# Altium PCB FMC-320U-B1.PcbDoc (part 1 of 2)
Units mil, origin at the board's own origin, x right, y up, seen from the top; angles counter-clockwise.
Board outline 3385.83 x 3385.83 mil, 2 copper layers (Top Layer, Bottom Layer), stack 65.8 mil thick; 83 components, 122 nets, 425 pads, 151 vias.
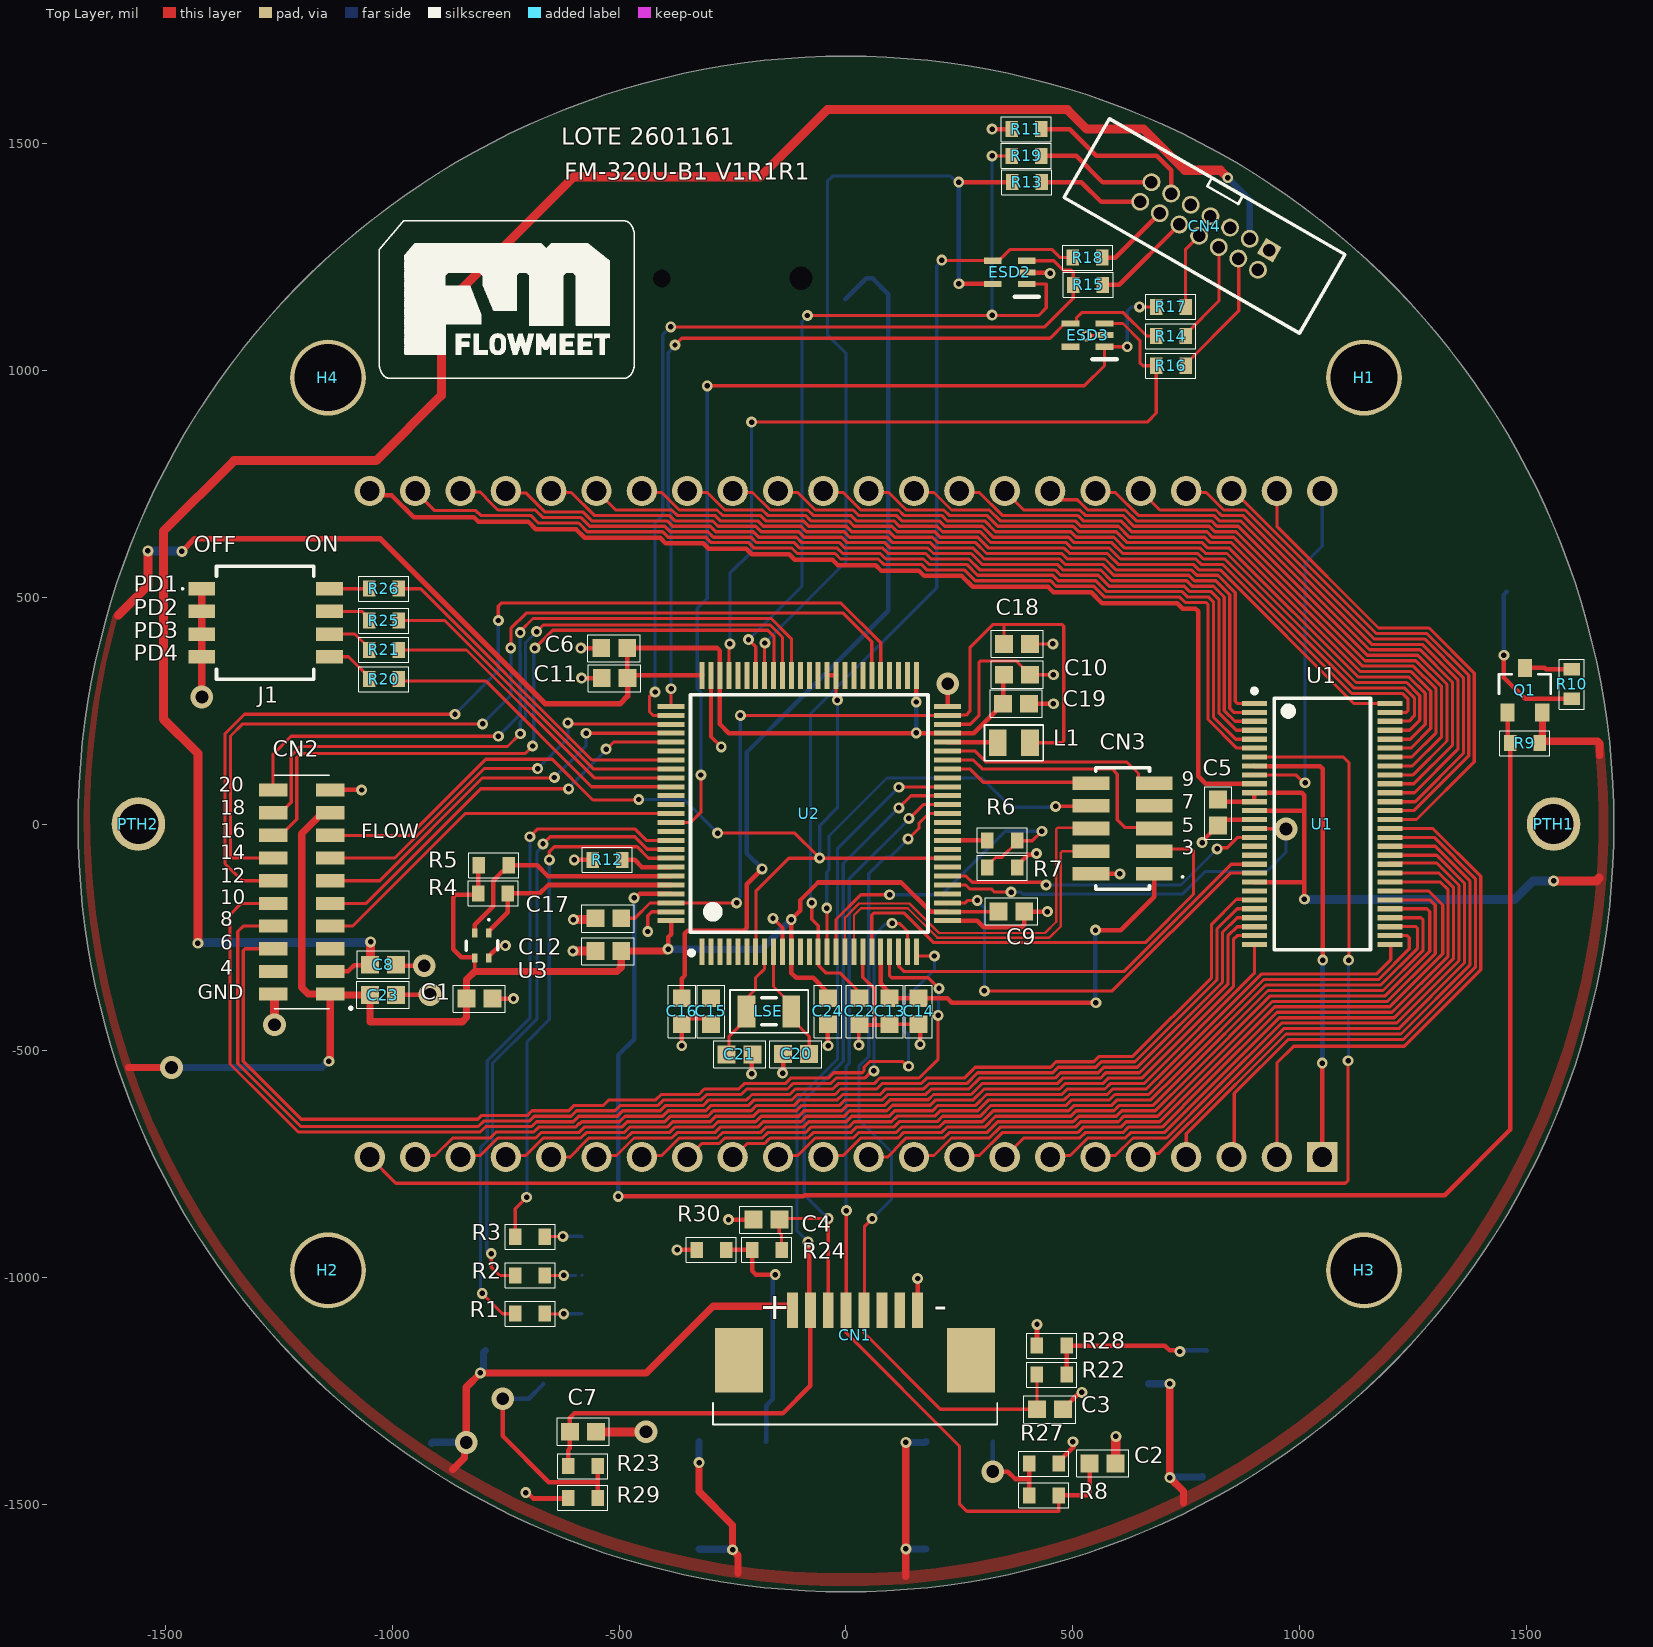
[diagram p0: Top Layer view]
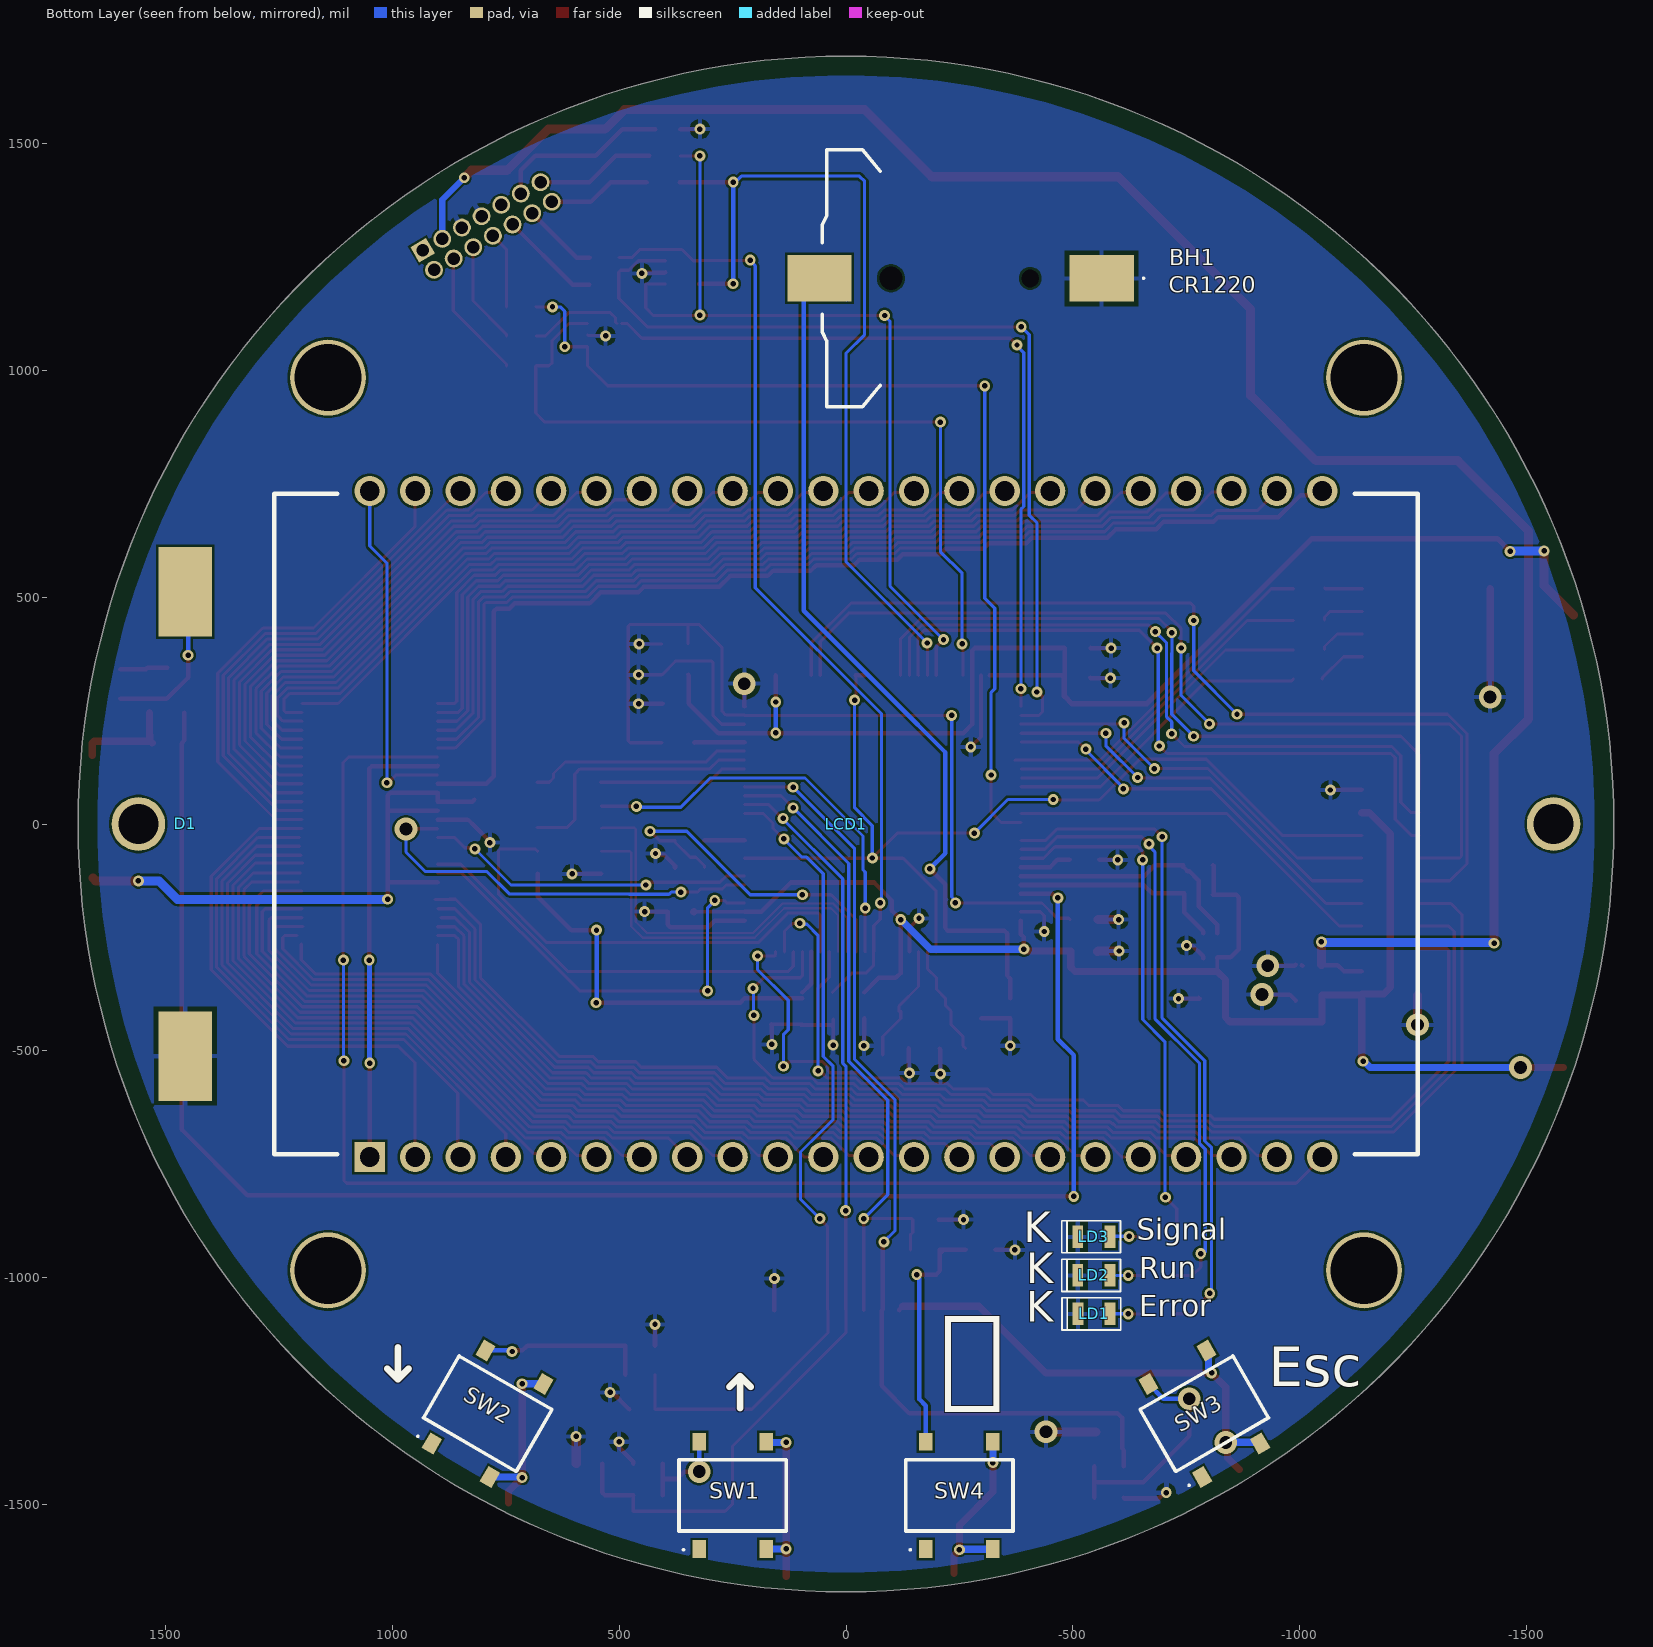
[diagram p1: Bottom Layer view, seen from below]
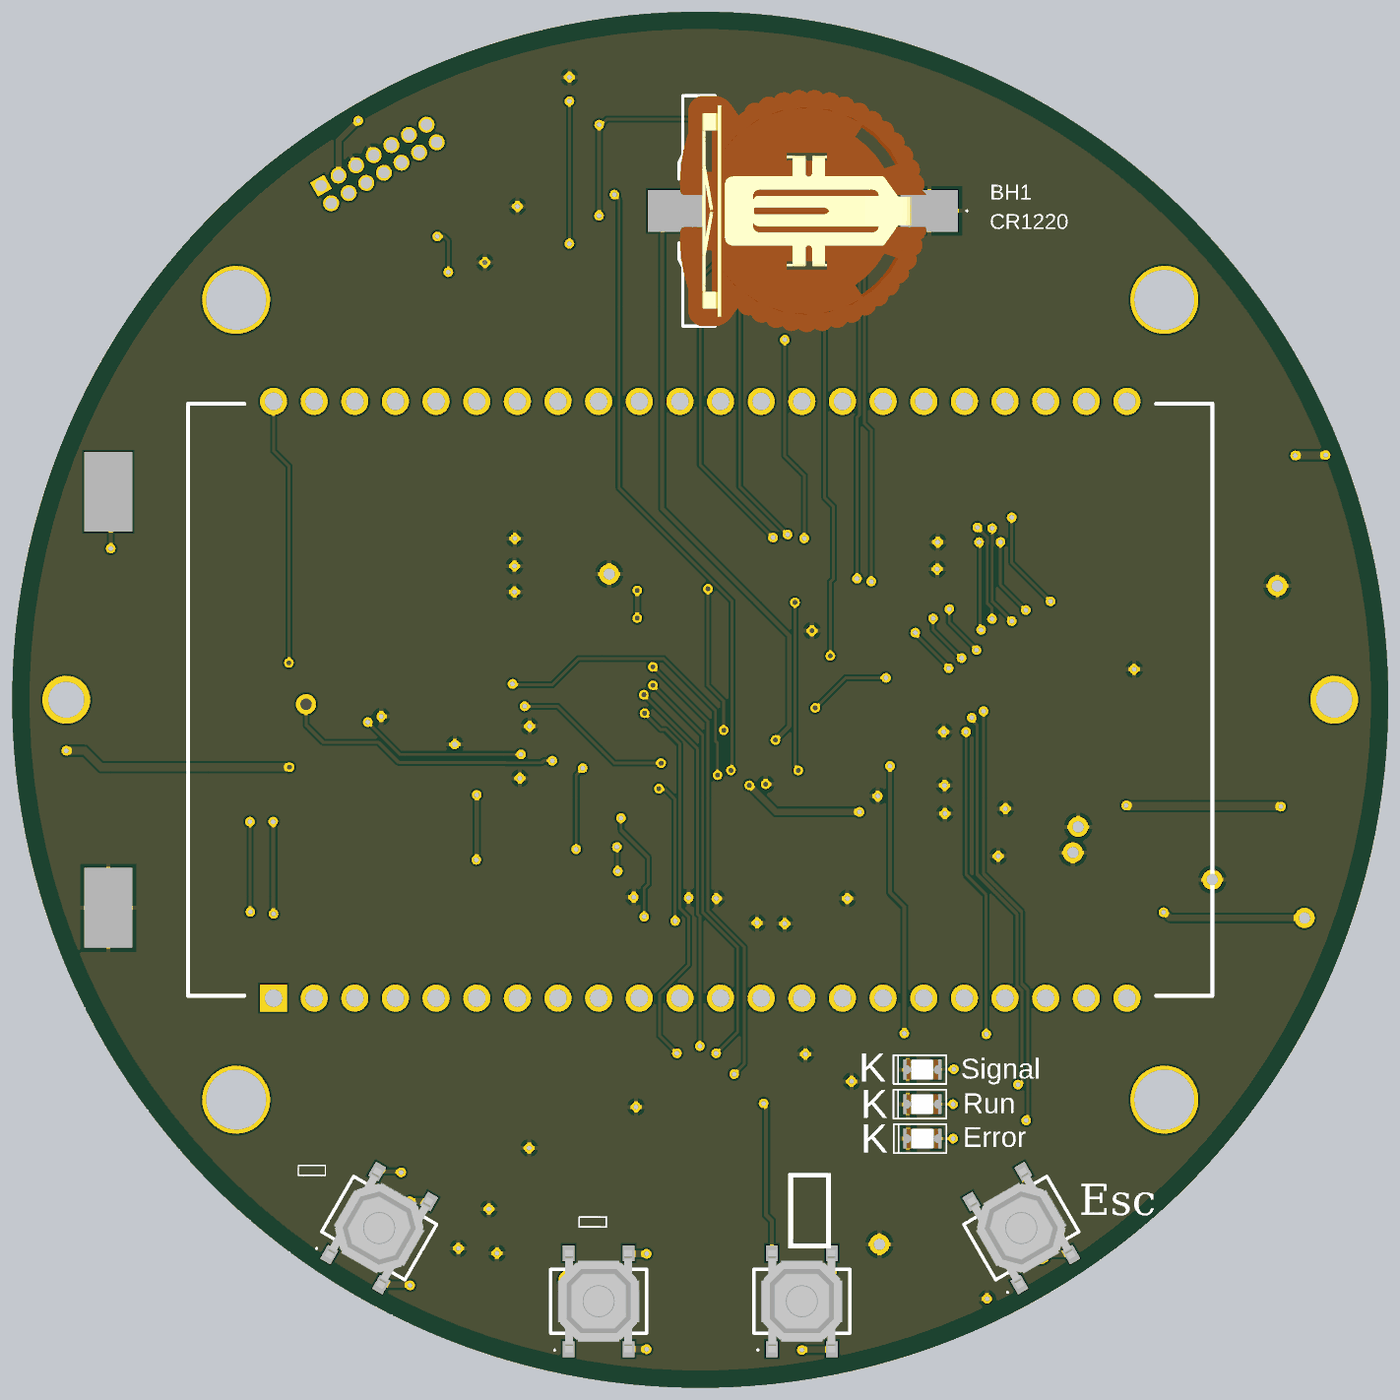
[diagram p3: 3D render of the assembled board from below, using the file's embedded part models]

## Layer stack, top to bottom
Top Solder: solder mask 0.4, Solder Resist, Dk 3.5
Top Layer: signal copper 1.4
Dielectric 1: dielectric 63, FR-4, Dk 4.8
Bottom Layer: signal copper 1.4
Bottom Solder: solder mask 0.4, Solder Resist, Dk 3.5

## Board outline
0,-1692.91 cw(c0,0) -1692.91,0 cw(c0,0) 0,1692.91 cw(c0,0) 1692.91,0 cw(c0,0)

## Design rules (kind name [scope] priority, off if disabled: settings)
BoardOutlineClearance [All] p1: gap=10 ignorepadtopadclearanceinfootprint=FALSE except(0: Arc-SplitContinuation Track-SplitContinuation SMDPad-SplitContinuation THPad-SplitContinuation Via-SplitContinuation Fill-SplitContinuation Poly-SplitContinuation Region-SplitContinuation Text-SplitContinuation)
Clearance [All] p1: gap=5 ignorepadtopadclearanceinfootprint=FALSE
HoleSize [All] p1: absolutevalues=TRUE maxlimit=235 minlimit=6 maxpercent=80.000 minpercent=20.000
MinimumSolderMaskSliver [All] p1: minsoldermaskwidth=4
NetAntennae [All] p1: netantennaetolerance=1
PolygonConnect [All] p1: connectstyle=Relief reliefconductorwidth=10 reliefentries=4 polygonreliefangle="90 Angle" airgapwidth=10
RoutingVias [All] p1: holewidth=12 width=16 viastyle="Through Hole" minholewidth=28 minwidth=50 maxholewidth=12 maxwidth=24 useviatemplates=TRUE viatemplateguid#1={D86EAC3F-4B13-4CEF-9B37-389D9234238A} viatemplatename#1=v61h30
SilkToSolderMaskClearance [IsPad] p1: minsilkscreentomaskgap=5 clearancetoexposedcopper=TRUE
SolderMaskExpansion [All] p1: expansion=2 istentingtop=FALSE
Width [All] p1: maxlimit=100 minlimit=5 preferedwidth=7
26 further rules are at their usual default settings.

## Components (designator, comment, footprint, x,y, rotation, side; value= is the part's Value field where it differs from the comment)
BH1 "BS-12-B3AA011" BS-12-B3AA011 -252.54,1203 r0 bottom locked
C1 "100nF" CAP_SM0603_YAGEOCC2_N#1 -808,-385 r180 top
C2 "100nF" CAP_SM0603_YAGEOCC2_N#1 565.83,-1410 r0 top
C3 "100nF" CAP_SM0603_YAGEOCC2_N#1 449.69,-1290.19 r180 top
C4 "100nF" CAP_SM0603_YAGEOCC2_N#1 -175.62,-872 r180 top
C5 "100nF" CAP_SM0603_YAGEOCC2_N#1 820,25 r270 top
C6 "100nF" CAP_SM0603_YAGEOCC2_N#1 -511,388 r180 top
C7 "100nF" CAP_SM0603_YAGEOCC2_N#1 -580,-1340 r0 top
C8 "100nF" CAP_SM0603_YAGEOCC2_N#1 -1020.64,-310.43 r0 top
C9 "100nF" CAP_SM0603_YAGEOCC2_N#1 364.44,-193 r0 top
C10 "100nF" CAP_SM0603_YAGEOCC2_N#1 376.81,329 r0 top
C11 "100nF" CAP_SM0603_YAGEOCC2_N#1 -510,322 r180 top
C12 "100nF" CAP_SM0603_YAGEOCC2_N#1 -524,-280 r180 top
C13 "100nF" CAP_SM0603_YAGEOCC2_N#1 96,-412.87 r270 top
C14 "2.2uF" CAP_SM0603_YAGEOCC2_N#1 160,-412.87 r270 top
C15 "100nF" CAP_SM0603_YAGEOCC2_N#1 -298,-412.87 r270 top
C16 "1uF" CAP_SM0603_YAGEOCC2_N#2 -362,-412.87 r270 top
C17 "2.2uF" CAP_SM0603_YAGEOCC2_N#1 -524,-207.71 r180 top
C18 "2.2uF" CAP_SM0603_YAGEOCC2_N#1 376.81,397 r0 top
C19 "10uF" CAP_SM0603_YAGEOCC2_N#1 374.93,265.14 r0 top
C20 "12pF" CAP_SM0603_YAGEOCC2_N#1 -110,-506.87 r180 top
C21 "12pF" CAP_SM0603_YAGEOCC2_N#1 -235,-507.87 r0 top
C22 "100nF" CAP_SM0603_YAGEOCC2_N#1 30,-412.87 r270 top
C23 "10uF" CAP_SM0603_YAGEOCC2_N#1 -1021,-377 r0 top
C24 "100nF" CAP_SM0603_YAGEOCC2_N#1 -40,-412.87 r270 top
CN1 "A10FC-S08FCA-H25" 849528 20,-1198 r0 top locked
CN2 "DW127S-22-20-43" DW127S-22-20-43 -1200,-150 r90 top
CN3 "DW127S-22-10-43" DW127S-22-10-43 610,-10 r90 top
CN4 "20021511-00014T4LF" 2002151100014T4LF 790.9,1318.35 r150 top
D1 "BACKLIGHT" BACKLIGHT_2 0,0 r180 bottom locked
ESD2 "ESDALC6V1W5" ESDALC6V1W5 361,1216 r180 top
ESD3 "ESDALC6V1W5" ESDALC6V1W5 532.6,1077.79 r180 top
H1 "C193465-HOLE" C193465-HOLE 1142,984 r0 top
H2 "C193465-HOLE" C193465-HOLE -1142,-984 r0 top
H3 "C193465-HOLE" C193465-HOLE 1142,-984 r0 top
H4 "C193465-HOLE" C193465-HOLE -1142,984 r0 top
J1 "DSHP04TSGER" DSHP04TSGER -1299.21,443.74 r270 top
L1 "2.2uH" LQM21PN2R2MGHL 370,179 r180 top
LCD1 "FM-160LCD-V2R2R1" "FMC-160LCD V2" 0,0 r180 bottom locked
LD1 "RED" "LED 0805" -546.81,-1080 r0 bottom
LD2 "RED" "LED 0805" -546.38,-995 r0 bottom
LD3 "GREEN" "LED 0805" -546.38,-910 r0 bottom
LSE "32,768 kHz" SC-32S32.768kHz20PPM12.5pF -170,-413 r180 top
PTH1 "PTH-2MM-M" PTH_M2_M 1560,0 r0 top
PTH2 "PTH-2MM-M" PTH_M2_M -1560,0 r0 top
Q1 "DMG3401LSN-7" DMG3401LSN-7 1496.89,300.85 r90 top
R1 "2K2" RES_SM0603_YAGEORC_N -696.63,-1079.61 r0 top
R2 "2K2" RES_SM0603_YAGEORC_N -696.56,-995.28 r0 top
R3 "2K2" RES_SM0603_YAGEORC_N -696.56,-910 r0 top
R4 "10K" RES_SM0603_YAGEORC_N -778,-153 r180 top
R5 "10K" RES_SM0603_YAGEORC_N -776.56,-91 r180 top
R6 "100K" RES_SM0603_YAGEORC_N 344.44,-36 r180 top
R7 "100K" RES_SM0603_YAGEORC_N 344.44,-96 r180 top
R8 "100K" RES_SM0603_YAGEORC_N 436.39,-1480 r0 top
R9 "1M" RES_SM0603_YAGEORC_N 1496.89,178.41 r0 top
R10 "47R" RES_SM0603_YAGEORC_N 1600,308.41 r90 top
R11 "100R" RES_SM0603_YAGEORC_N 397.87,1532 r0 top
R12 "10K" RES_SM0603_YAGEORC_N -526,-79 r0 top
R13 "47R" RES_SM0603_YAGEORC_N 398.78,1415 r180 top
R14 "47R" RES_SM0603_YAGEORC_N 716.08,1075.82 r180 top
R15 "47R" RES_SM0603_YAGEORC_N 533.6,1188.7 r180 top
R16 "47R" RES_SM0603_YAGEORC_N 716.08,1010.2 r180 top
R17 "47R" RES_SM0603_YAGEORC_N 716.08,1140.2 r180 top
R18 "47R" RES_SM0603_YAGEORC_N 532.6,1248.7 r180 top
R19 "47R" RES_SM0603_YAGEORC_N 397.87,1473 r180 top
R20 "1K" RES_SM0603_YAGEORC_N -1018.85,319.52 r0 top
R21 "1K" RES_SM0603_YAGEORC_N -1018.85,383.7 r0 top
R22 "100K" RES_SM0603_YAGEORC_N 453.62,-1214.06 r180 top
R23 "100K" RES_SM0603_YAGEORC_N -580,-1415.71 r180 top
R24 "100K" RES_SM0603_YAGEORC_N -174.56,-939 r0 top
R25 "1K" RES_SM0603_YAGEORC_N -1018.85,448.64 r0 top
R26 "1K" RES_SM0603_YAGEORC_N -1018.85,518.74 r0 top
R27 "100K" RES_SM0603_YAGEORC_N 436.39,-1410 r180 top
R28 "100K" RES_SM0603_YAGEORC_N 453.62,-1150 r0 top
R29 "100K" RES_SM0603_YAGEORC_N -580,-1485.71 r0 top
R30 "100K" RES_SM0603_YAGEORC_N -297,-939 r0 top
SW1 "TS-1187A-B-A-B" TS-1187A-B-A-B 250,-1480 r90 bottom locked
SW2 "TS-1187A-B-A-B" TS-1187A-B-A-B 790,-1300 r120 bottom
SW3 "TS-1187A-B-A-B" TS-1187A-B-A-B -790,-1300 r60 bottom
SW4 "TS-1187A-B-A-B" TS-1187A-B-A-B -250,-1480 r90 bottom
U1 "" "LCD DRIVER - TSSOP56" 1050,0 r0 top locked
U2 "STM32U575VIT6Q" STM32U575VI -81,23 r90 top locked
U3 "STS40-BD1B-R3" STS40BD1BR3 -803,-268 r270 top

## Footprints (in the part's own frame and the unit in brackets; to place one, negate y for a bottom-side part, rotate by r counter-clockwise, add the part's x,y. Pads: shape width x height; smd on the part's side, far side on the other; paste and mask are expansions set on the pad)
849528 [mm]
  rect 0.61x2 smd: 1(-3.5,3.2) 2(-2.5,3.2) 3(-1.5,3.2) 4(-0.5,3.2) 5(0.5,3.2) 6(1.5,3.2) 7(2.5,3.2) 8(3.5,3.2)
  rect 2.68x3.6 smd: MP1(-6.49,0.4) MP2(6.49,0.4)
  silkscreen extent -7.96,-3.2 7.96,-2, body extent -8.06,-3.11 7.87,3.43, height 2.64
2002151100014T4LF [mm]
  rect 1x1 hole 0.7: 1(-3.81,-0.635)
  round 1 hole 0.7: 2(-3.81,0.635) 3(-2.54,-0.635) 4(-2.54,0.635) 5(-1.27,-0.635) 6(-1.27,0.635) 7(0,-0.635) 8(0,0.635) 9(1.27,-0.635) 10(1.27,0.635) 11(2.54,-0.635) 12(2.54,0.635) 13(3.81,-0.635) 14(3.81,0.635)
  silkscreen extent -7.6,-2.54 7.62,2.55, body extent -7.57,-2.55 7.62,2.55, height 5.4
BACKLIGHT_2 [mm]
  rect 3x5 smd: 1(-37,13) 2(-37,-13)
  body extent -34.5,-16.5 34.5,16.5, height 2.8
BS-12-B3AA011 [mm]
  round 0.8 hole 1 unplated: 1(-3.9,0)
  round 1 hole 1.3 unplated: 2(3.9,0)
  rect 3.6x2.6 smd: NEG(-7.9,0) POS(7.9,0)
  silkscreen extent -10.3,-7.2 7.74,7.2, body extent -9.54,-7.55 9.26,7.59, height 3.83
C193465-HOLE [mm]
  round 4.25 hole 3.75: 1(0,0)
CAP_SM0603_YAGEOCC2_N#1 [mm] "Capacitor, Yageo CC Class2, SM0603, IPC Medium Density"
  rect 1x1 smd: 1(-0.727,0) 2(0.727,0)
  silkscreen extent -1.45,-0.75 1.47,0.78, body extent -0.9,-0.5 0.9,0.5, height 0.9
CAP_SM0603_YAGEOCC2_N#2 [mm] "Capacitor, Yageo CC Class2, SM0603, IPC Medium Density"
  rect 1x1 smd mask+0.051: 1(-0.727,0)
  rect 1x1 smd: 2(0.727,0)
  silkscreen extent -1.45,-0.75 1.47,0.78, body extent -0.9,-0.5 0.9,0.5, height 0.9
DMG3401LSN-7 [mm]
  rect 1x0.8 smd: D(1.1,0) G(-1.4,0.975) S(-1.4,-0.975)
  silkscreen extent -0.35,-1.45 0.75,1.45, body extent -1.68,-1.55 1.32,1.55, height 1.45
DSHP04TSGER [mm]
  rect 0.76x1.5 smd: A1(-1.905,-3.075) A2(-0.635,-3.075) A3(0.635,-3.075) A4(1.905,-3.075) B1(-1.905,4.075) B2(-0.635,4.075) B3(0.635,4.075) B4(1.905,4.075)
  silkscreen extent -3.16,-4.2 3.16,3.2, body extent -3.15,-2.85 3.15,3.85, height 1.65
DW127S-22-10-43 [mm]
  rect 0.76x2.05 smd: 1(-2.54,-1.775) 2(-2.54,1.775) 3(-1.27,-1.775) 4(-1.27,1.775) 5(0,-1.775) 6(0,1.775) 7(1.27,-1.775) 8(1.27,1.775) 9(2.54,-1.775) 10(2.54,1.775)
  silkscreen extent -3.4,-3.4 3.4,1.5, body extent -3.38,-2.29 3.43,2.21, height 4.5
DW127S-22-20-43 [mm]
  rect 0.74x1.6 smd: 1(-5.715,-1.6) 2(-5.715,1.6) 3(-4.445,-1.6) 4(-4.445,1.6) 5(-3.175,-1.6) 6(-3.175,1.6) 7(-1.905,-1.6) 8(-1.905,1.6) 9(-0.635,-1.6) 10(-0.635,1.6) 11(0.635,-1.6) 12(0.635,1.6) 13(1.905,-1.6) 14(1.905,1.6) 15(3.175,-1.6) 16(3.175,1.6) 17(4.445,-1.6) 18(4.445,1.6) 19(5.715,-1.6) 20(5.715,1.6)
  silkscreen extent -6.55,-2.8 6.54,1.53, body extent -6.58,-2.2 6.58,2.25, height 2.1
ESDALC6V1W5 [mm]
  rect 1x0.35 smd: 1(-0.95,0.65) 2(-0.95,0) 3(-0.95,-0.65) 4(0.95,-0.65) 5(0.95,0.65)
  silkscreen extent -1.62,1.35 -0.28,1.35, body extent -1.07,-1 1.03,1, height 1.1
"FMC-160LCD V2" [mm]
  rect 1.7x1.7 hole 1.1: 1(-26.67,-18.65)
  round 1.7 hole 1.1: 2(-24.13,-18.65) 3(-21.59,-18.65) 4(-19.05,-18.65) 5(-16.51,-18.65) 6(-13.97,-18.65) 7(-11.43,-18.65) 8(-8.89,-18.65) 9(-6.35,-18.65) 10(-3.81,-18.65) 11(-1.27,-18.65) 12(1.27,-18.65) 13(3.81,-18.65) 14(6.35,-18.65) 15(8.89,-18.65) 16(11.43,-18.65) 17(13.97,-18.65) 18(16.51,-18.65) 19(19.05,-18.65) 20(21.59,-18.65) 21(24.13,-18.65) 22(26.67,-18.65) 23(26.67,18.65) 24(24.13,18.65) 25(21.59,18.65) 26(19.05,18.65) 27(16.51,18.65) 28(13.97,18.65) 29(11.43,18.65) 30(8.89,18.65) 31(6.35,18.65) 32(3.81,18.65) 33(1.27,18.65) 34(-1.27,18.65) 35(-3.81,18.65) 36(-6.35,18.65) 37(-8.89,18.65) 38(-11.43,18.65) 39(-13.97,18.65) 40(-16.51,18.65) 41(-19.05,18.65) 42(-21.59,18.65) 43(-24.13,18.65) 44(-26.67,18.65)
  silkscreen extent -32,-18.5 32,18.5, body extent -32,-19.56 32,19.54, height 5.6
"LCD DRIVER - TSSOP56" [mm] "TSSOP, 56-Leads, Body 14,00x6,10mm, Pitch 0,50mm, IPC Medium Density"
  rect 1.4x0.295 smd: 1(-3.8,6.75) 2(-3.8,6.25) 3(-3.8,5.75) 4(-3.8,5.25) 5(-3.8,4.75) 6(-3.8,4.25) 7(-3.8,3.75) 8(-3.8,3.25) 9(-3.8,2.75) 10(-3.8,2.25) 11(-3.8,1.75) 12(-3.8,1.25) 13(-3.8,0.75) 14(-3.8,0.25) 15(-3.8,-0.25) 16(-3.8,-0.75) 17(-3.8,-1.25) 18(-3.8,-1.75) 19(-3.8,-2.25) 20(-3.8,-2.75) 21(-3.8,-3.25) 22(-3.8,-3.75) 23(-3.8,-4.25) 24(-3.8,-4.75) 25(-3.8,-5.25) 26(-3.8,-5.75) 27(-3.8,-6.25) 28(-3.8,-6.75) 29(3.8,-6.75) 30(3.8,-6.25) 31(3.8,-5.75) 32(3.8,-5.25) 33(3.8,-4.75) 34(3.8,-4.25) 35(3.8,-3.75) 36(3.8,-3.25) 37(3.8,-2.75) 38(3.8,-2.25) 39(3.8,-1.75) 40(3.8,-1.25) 41(3.8,-0.75) 42(3.8,-0.25) 43(3.8,0.25) 44(3.8,0.75) 45(3.8,1.25) 46(3.8,1.75) 47(3.8,2.25) 48(3.8,2.75) 49(3.8,3.25) 50(3.8,3.75) 51(3.8,4.25) 52(3.8,4.75) 53(3.8,5.25) 54(3.8,5.75) 55(3.8,6.25) 56(3.8,6.75)
  silkscreen extent -3.92,-7.05 2.7,7.57, body extent -4.05,-7.05 4.05,7.05, height 1.2
"LED 0805" [mm]
  rect 0.6x1.25 smd: A(-0.9,0) K(0.9,0)
  silkscreen extent -1.5,-0.9 1.8,0.9, body extent -1,-0.63 1,0.63, height 1
LQM21PN2R2MGHL [mm]
  rect 1x1.5 smd: 1(-0.9,0) 2(0.9,0)
  silkscreen extent -1.65,-1 1.65,1, body extent -1,-0.63 1,0.63, height 1.02
PTH_M2_M [mm]
  round 3 hole 2.25: 1(0,0)
RES_SM0603_YAGEORC_N [mm] "Resistor, Yageo RC_L, SM0603, IPC Medium Density"
  rect 0.7x0.9 smd: 1(-0.827,0) 2(0.827,0)
  silkscreen extent -1.4,-0.7 1.4,0.7, body extent -0.85,-0.45 0.85,0.45, height 0.55
SC-32S32.768kHz20PPM12.5pF [mm]
  rect 1x1.8 smd: 1(-1.25,0) 2(1.25,0)
  silkscreen extent -2.21,-1.19 2.18,1.19, body extent -1.65,-0.84 1.65,0.76, height 0.84
STM32U575VI [mm] "Ultra-low-power with FPU Arm Cortex-M33 MCU with TrustZone, 160 MHz with 2 Mbytes of Flash memory"
  rect 1.5x0.28 smd mask+0.051: 1(-7.738,6) 2(-7.738,5.5) 3(-7.738,5) 4(-7.738,4.5) 5(-7.738,4) 6(-7.738,3.5) 7(-7.738,3) 8(-7.738,2.5) 9(-7.738,2) 10(-7.738,1.5) 11(-7.738,1) 12(-7.738,0.5) 13(-7.738,0) 14(-7.738,-0.5) 15(-7.738,-1) 16(-7.738,-1.5) 17(-7.738,-2) 18(-7.738,-2.5) 19(-7.738,-3) 20(-7.738,-3.5) 21(-7.738,-4) 22(-7.738,-4.5) 23(-7.738,-5) 24(-7.738,-5.5) 25(-7.738,-6) 51(7.738,-6) 52(7.738,-5.5) 53(7.738,-5) 54(7.738,-4.5) 55(7.738,-4) 56(7.738,-3.5) 57(7.738,-3) 58(7.738,-2.5) 59(7.738,-2) 60(7.738,-1.5) 61(7.738,-1) 62(7.738,-0.5) 63(7.738,0) 64(7.738,0.5) 65(7.738,1) 66(7.738,1.5) 67(7.738,2) 68(7.738,2.5) 69(7.738,3) 70(7.738,3.5) 71(7.738,4) 72(7.738,4.5) 73(7.738,5) 74(7.738,5.5) 75(7.738,6)
  rect 0.28x1.5 smd mask+0.051: 26(-6,-7.738) 27(-5.5,-7.738) 28(-5,-7.738) 29(-4.5,-7.738) 30(-4,-7.738) 31(-3.5,-7.738) 32(-3,-7.738) 33(-2.5,-7.738) 34(-2,-7.738) 35(-1.5,-7.738) 36(-1,-7.738) 37(-0.5,-7.738) 38(0,-7.738) 39(0.5,-7.738) 40(1,-7.738) 41(1.5,-7.738) 42(2,-7.738) 43(2.5,-7.738) 44(3,-7.738) 45(3.5,-7.738) 46(4,-7.738) 47(4.5,-7.738) 48(5,-7.738) 49(5.5,-7.738) 50(6,-7.738) 76(6,7.738) 77(5.5,7.738) 78(5,7.738) 79(4.5,7.738) 80(4,7.738) 81(3.5,7.738) 82(3,7.738) 83(2.5,7.738) 84(2,7.738) 85(1.5,7.738) 86(1,7.738) 87(0.5,7.738) 88(0,7.738) 89(-0.5,7.738) 90(-1,7.738) 91(-1.5,7.738) 92(-2,7.738) 93(-2.5,7.738) 94(-3,7.738) 95(-3.5,7.738) 96(-4,7.738) 97(-4.5,7.738) 98(-5,7.738) 99(-5.5,7.738) 100(-6,7.738)
  silkscreen extent -7.9,-6.65 6.65,6.7, body extent -8.1,-8.1 8.1,8.1, height 1.6
STS40BD1BR3 [mm]
  rect 0.5x0.3 smd: 1(-0.7,0.4) 2(-0.7,-0.4) 3(0.7,-0.4) 4(0.7,0.4)
  silkscreen extent -1.5,-0.88 0.25,0.89, body extent -0.75,-0.75 0.75,0.75, height 0.75
TS-1187A-B-A-B [mm]
  rect 1x0.75 smd: 1(-3,1.875) 2(3,1.875) 3(-3,-1.875) 4(3,-1.875)
  silkscreen extent -3.1,-3 2,3, body extent -3.2,-2.55 3.2,2.55, height 2

## Part data
BH1: "Battery holder CR1020 SMD", Manufacturer=Myoung, Temperature Max=85, Temperature Min=-25, Category="Battery holder", Datasheet=https://datasheet.lcsc.com/lcsc/2012181809_MYOUNG-BS-08-B2AA016_C964792.pdf, Manufacturer part number=BS-12-B3AA011
C1 C2 C3 C4 C5 C6 C7 C8 C9 C10 C11 C12 C13 C15 C22 C24: library part CC0603KRX7R9BB104, "CAP 100nF SM0603 X7R 50V YAGEO CC2", Manufacturer=Yageo, Package=0603, Supplier Part Number 1=1362556, Tolerance (%)=10, Voltage Rating (Volts)=50, Category=Capacitor, ComponentLink1Description="Manufacturer Website", ComponentLink1URL=http://www.yageo.com, Datasheet=https://datasheet.lcsc.com/lcsc/2211101700_YAGEO-CC0603KRX7R9BB104_C14663.pdf, Manufacturer part number=CC0603KRX7R9BB104, Supplier 1=Farnell, Supplier 2=Digi-Key, Supplier Part Number 2=311-1344-1-ND
C14 C17 C18: library part CC0603KRX7R6BB225, "CAP 2.2uF (2u2F) SM0603 X7R 10V YAGEO CC2", Manufacturer=Yageo, Package=0603, Tolerance (%)=10, Category=Capacitor, ComponentLink1Description="Manufacturer Website", ComponentLink1URL=http://www.yageo.com, Datasheet=https://datasheet.lcsc.com/lcsc/2004231434_YAGEO-CC0603KRX7R6BB225_C513691.pdf, Manufacturer part number=CC0603KRX7R6BB225, Voltage Rating (Volts)=10
C16: library part CC0603KRX7R6BB105, "CAP 1uF SM0603 X7R 10V YAGEO CC2", Manufacturer=Yageo, Package=0603, Tolerance (%)=5, Voltage Rating (Volts)=50, Category=Capacitor, ComponentLink1Description="Manufacturer Website", ComponentLink1URL=http://www.yageo.com, Datasheet=https://datasheet.lcsc.com/lcsc/2304140030_YAGEO-CC0603KRX7R6BB105_C113807.pdf, Manufacturer part number=CC0603KRX7R6BB105
C19 C23: library part CC0603KRX5R6BB106, "CAP 10uF SM0603 X5R 10V YAGEO", Manufacturer=Yageo, Package=0603, Tolerance=10, Category=Capacitor, ComponentLink1Description="Manufacturer Website", ComponentLink1URL=http://www.yageo.com, Manufacturer part number=CC0603KRX5R6BB106
C20 C21: library part CC0603JRNPO9BN120, "CAP 12pF SM0603 NPO 50V YAGEO CC2", Manufacturer=Yageo, Package=0603, Supplier Part Number 1=721979, Tolerance (%)=5, Voltage Rating (Volts)=50, Category=Capacitor, ComponentLink1Description="Manufacturer Website", ComponentLink1URL=http://www.yageo.com, Datasheet=https://datasheet.lcsc.com/lcsc/2304140030_YAGEO-CC0603JRNPO9BN120_C107034.pdf, Manufacturer part number=CC0603JRNPO9BN120, Supplier 1=Farnell, Supplier 2=Digi-Key, Supplier Part Number 2=311-1059-1-ND
CN1: "FFC/FPC Connector 8 Position 1mm Pitch Bottom Contact Surface Mount, Right Angle -40℃~+85℃", Manufacturer=JXTCONN, Vendor Part Number=C42447839, Manufacturer part number=A10FC-S08FCA-H25, Price=0.089, Vendor=LCSC
CN2: "Header Female SMD 1.27mm 2x10", Manufacturer=Dealon, Manufacturer_Part_Number=DW127S-22-20-43, Vendor=LCSC
CN3: "Header Female SMD 1.27mm 2x5", Manufacturer=Dealon, Manufacturer part number=DW127S-22-10-43, Vendor=LCSC
CN4: "1.27mm (0.05in.) pitch, Shrouded pin header, 14 contacts", Manufacturer="Amphenol ICC", Manufacturer part number=20021511-00014T4LF
D1: library part FM-160-BACKLIGHT, "IF=45mA;VF=3V", Manufacturer=FLOWMEET, Temperature Max=-, Category=Backlight, Datasheet=-, Manufacturer part number=FM-160-BACKLIGHT, Temperature Min=-
ESD2 ESD3: "TVS Diode Array Uni-Directional 6.1V  / QTY 5 per pack, SOT-323 /  / Ranking 5:  / Marca reconocida. / Usado en placas nucleo, sometidas a manipuleo nunca note un pin quemado por ESD.", Manufacturer=ST, Temperature Max=150, Temperature Min=-40, Category=Diodo, Datasheet=https://www.st.com/content/ccc/resource/technical/document/datasheet/32/30/02/e6/ac/0f/46/c2/CD00002946.pdf/files/CD00002946.pdf/jcr:content/translations/en.CD00002946.pdf, Manufacturer part number=ESDALC6V1W5
H1 H2 H3 H4: "Agujero pasante", Temperature Max=-, Category="Mounting Hole", Temperature Min=-
J1: "DIP Switches / SIP Switches 4pos 0.025A 24VDC 1/2 Pitch", Manufacturer=Kangshen, Vendor Part Number=C3293144, Manufacturer part number=DSHP04TSGER, Vendor=LCSC
L1: library part LQM21PN2R2MGHL, "Inductores de potencia - SMD 2.2 UH 20%", Manufacturer="Murata Electronics", Temperature Max=85, Temperature Min=-40, Category=Inductor, Datasheet=https://ar.mouser.com/datasheet/2/281/1/JELF243B_0040-961444.pdf, Manufacturer part number=LQM21PN2R2MGHL
LCD1: Manufacturer=FLOWMEET, Temperature Max=70, Temperature Min=-20, Category=LCD, Datasheet=-, Manufacturer part number=FM-160LCD-V2R2R1
LD1 LD2: library part 17-21SURC/S530-A2/TR8, Manufacturer="Everlight Elec", Temperature Max=85, Temperature Min=-40, Category=LED, Datasheet=https://mm.digikey.com/Volume0/opasdata/d220001/medias/docus/2236/17-21SURC-S530-A2-TR8-V5~.pdf, Manufacturer part number=17-21SURC/S530-A2/TR8
LD3: library part 17-21SYGC/S530-E2/TR8, Manufacturer="Everlight Elec", Manufacturer part number=21SYGC/S530-E2/TR8, Temperature Max=85, Temperature Min=-40, Category=LED, Datasheet=https://mm.digikey.com/Volume0/opasdata/d220001/medias/docus/559/17-21SYGC,S530-E2,TR8.pdf
LSE: library part SC32S-12.5PF20PPM, "Cristal Oscilador 32.768 kHz, 12.5pF", Manufacturer=Seiko, Temperature Max=85, Temperature Min=-40, Category="Cristal Oscilador", Datasheet=https://datasheet.lcsc.com/lcsc/1811151435_Seiko-SC-32S32-768kHz20PPM12-5pF_C97606.pdf, Manufacturer part number=SC32S-12.5PF20PPM
PTH1 PTH2: "Montaje rosca 2mm, holgura miniama", Temperature Max=-, Category="Mounting Hole", Temperature Min=-
Q1: "P-CHANNEL ENHANCEMENT MODE MOSFET / RDS(ON) = 85mΩ @ VGS = -2.5V -> ID -2.7A / V(BR)DDS 30V", Manufacturer="Diodes Incorporated", Temperature Max=150, Temperature Min=-55, Category="Transistor mosfet", Datasheet=https://www.diodes.com/assets/Datasheets/DMG3401LSN.pdf, Manufacturer part number=DMG3401LSN-7
R1 R2 R3: library part RC0603FR-072K2L, "RES 2K2 SM0603 YAGEO RC_L", Manufacturer=Yageo, Package=0603, Power (Watts)=0.1, Resistance (Ohms)=2200, Supplier Part Number 1=9238522, Tolerance (%)=1, Category=Resistor, ComponentLink1Description="Manufacturer Website", ComponentLink1URL=http://www.yageo.com, Manufacturer part number=RC0603FR-072K2L, Supplier 1=Farnell, Supplier 2=Digi-Key, Supplier Part Number 2=311-2.20KHRCT-ND
R4 R5 R12: library part RC0603FR-0710KL, "RES 10K SM0603 YAGEO RC_L", Manufacturer=Yageo, Package=0603, Power (Watts)=0.1, Resistance (Ohms)=10000, Supplier Part Number 1=9238603, Tolerance (%)=1, Category=Resistor, ComponentLink1Description="Manufacturer Website", ComponentLink1URL=http://www.yageo.com, Manufacturer part number=RC0603FR-0710KL, Supplier 1=Farnell, Supplier 2=Digi-Key, Supplier Part Number 2=311-10.0KHRCT-ND
R6 R7 R8 R22 R23 R24 R27 R28 R29 R30: library part RC0603FR-13100KL, "RES 100K SM0603 YAGEO RC_L", Manufacturer=Yageo, Package=0603, Power (Watts)=0.1, Resistance (Ohms)=100000, Supplier Part Number 1=2309107, Tolerance (%)=1, Category=Resistor, ComponentLink1Description="Manufacturer Website", ComponentLink1URL=http://www.yageo.com, Manufacturer part number=RC0603FR-13100KL, Supplier 1=Farnell, Supplier 2=Digi-Key
R9: library part RC0603FR-071ML, "RES 1M SM0603 YAGEO RC_L", Manufacturer=Yageo, Package=0603, Power (Watts)=0.1, Resistance (Ohms)=1000000, Supplier Part Number 1=9238840, Tolerance (%)=1, Category=Resistor, ComponentLink1Description="Manufacturer Website", ComponentLink1URL=http://www.yageo.com, Datasheet=https://www.yageo.com/upload/media/product/productsearch/datasheet/rchip/PYu-RC_Group_51_RoHS_L_12.pdf, Manufacturer part number=RC0603FR-071ML, Supplier 1=Farnell, Supplier 2=Digi-Key, Supplier Part Number 2=311-1.00MHRCT-ND
R10 R13 R14 R15 R16 R17 R18 R19: library part RC0603FR-0747RL, "RES 47R SM0603 YAGEO RC_L", Manufacturer=Yageo, Package=0603, Power (Watts)=0.1, Resistance (Ohms)=47, Supplier Part Number 1=9238328, Tolerance (%)=1, Category=Resistor, ComponentLink1Description="Manufacturer Website", ComponentLink1URL=http://www.yageo.com, Manufacturer part number=RC0603FR-0747RL, Supplier 1=Farnell, Supplier 2=Digi-Key, Supplier Part Number 2=311-47.0HRCT-ND
R11: library part RC0603FR-07100RL, "RES 100R SM0603 YAGEO RC_L", Manufacturer=Yageo, Package=0603, Power (Watts)=0.1, Resistance (Ohms)=100, Supplier Part Number 1=9238360, Tolerance (%)=1, Category=Resistor, ComponentLink1Description="Manufacturer Website", ComponentLink1URL=http://www.yageo.com, Manufacturer part number=RC0603FR-07100RL, Supplier 1=Farnell, Supplier 2=Digi-Key, Supplier Part Number 2=311-100HRCT-ND
R20 R21 R25 R26: library part RC0603FR-071KL, "RES 1K SM0603 YAGEO RC_L", Manufacturer=Yageo, Package=0603, Power (Watts)=0.1, Resistance (Ohms)=1000, Supplier Part Number 1=9238484, Tolerance (%)=1, Category=Resistor, ComponentLink1Description="Manufacturer Website", ComponentLink1URL=http://www.yageo.com, Manufacturer part number=RC0603FR-071KL, Supplier 1=Farnell, Supplier 2=Digi-Key, Supplier Part Number 2=311-1.00KHRCT-ND
SW1 SW2 SW3 SW4: "Switch tactile SMD", Manufacturer="XKB Connectivity", Vendor Part Number=C318884, Manufacturer part number=TS-1187A-B-A-B, Vendor=LCSC
U1: library part PCF8553DTT/AY, "40 × 4 LCD SEGMENT DRIVER", Manufacturer=NXP, Temperature Max=85, Temperature Min=-40, Category=Driver, Datasheet=https://datasheet.lcsc.com/lcsc/2107141507_NXP-Semicon-PCF8553DTT-AJ_C2653705.pdf, Manufacturer part number=PCF8553DTT/AY
U2: Manufacturer=ST, Temperature Max=85, Temperature Min=-40, Category=Microcontrolador, Datasheet=https://www.st.com/resource/en/datasheet/stm32u575ag.pdf, Manufacturer part number=STM32U575VIT6Q
U3: "Board Mount Temperature Sensors Base Accuracy Version, I2C Address 0x45", Manufacturer=Sensirion, Manufacturer part number=STS40-BD1B-R3

## Via types
v1: diameter 24, hole 12, Top Layer to Bottom Layer, 140 vias
v2: diameter 50, hole 28, Top Layer to Bottom Layer, 11 vias

## Nets (pads, with @x,y where several pads share a name; then routed paths per layer and width w, separated by ;. In a path a pad name is that pad's centre, name@x,y a point inside that pad or via, vN(x,y) a via of type N, cw(c..) or ccw(c..) an arc to the next point about the centre after c; other vN are vias at no path point)
AVDD: C13.1 C14.1 CN3.1 U2.21 | length 927.9
  Top Layer w10: U2.21@76.48,-281.65 76.48,-351.86 C13.1@96,-371.38 ; C13.1@96,-384.25 223.65,-384.25 233.39,-394 v1(551,-394) ; v1(550,-234) 606,-234 679.88,-160.12 CN3.1@679.88,-110
  Bottom Layer w10: v1(550,-234) 550,-390 551,-391 v1(551,-394)
COM0: LCD1.22 U1.7 | length 3319
  Top Layer w7: LCD1.22@-1050,-734.25 -992.25,-792 1100.9,-792 1107,-785.9 v1(1107,-522) ; U1.7@900.39,147.64 1096.42,147.64 1109,135.06 1109,-299 v1(1108,-300)
  Bottom Layer w7: v1(1107,-522) 1107.5,-521.5 1107.5,-300.5 v1(1108,-300)
COM1: LCD1.1 U1.8 | length 1011
  Top Layer w10: U1.8@900.39,127.95 900.8,127.55 1045.14,127.55 1051,121.69 v1(1051,-300) ; LCD1.1@1050,-734.25 v1(1050,-527)
  Bottom Layer w10: LCD1.1@1050,-734.25 LCD1.1@1051,-733.25 ; v1(1050,-527) 1050.5,-526.5 1050.5,-300.5 v1(1051,-300)
COM2: LCD1.44 U1.9 | length 778.3
  Top Layer w7: U1.9@900.39,108.27 991.73,108.27 1009.17,90.83 v1(1012.23,90.83)
  Bottom Layer w7: v1(1012.23,90.83) 1012,91.05 1012,575 1050,613 LCD1.44@1050,734.25
COM3: LCD1.23 U1.10 | length 2430.7
  Top Layer w10: LCD1.23@-1050,734.25 -1040.07,724.32 -1001.54,724.32 -953.22,676 -820.21,676 -811,666.79 -700.88,666.79 -684.14,650.04 -595.14,650.04 -575.89,630.79 -409.83,630.79 -397.83,618.79 -314.8,618.79 -302.8,606.79 -219.77,606.79 -207.77,594.79 -124.74,594.79 -112.74,582.79 -29.71,582.79 -17.71,570.79 65.32,570.79 77.32,558.79 160.35,558.79 172.35,546.79 255.38,546.79 279.38,522.79 445.44,522.79 457.44,510.79 540.47,510.79 564.47,486.79 730.53,486.79 742.53,474.79 770.54,474.79 776.4,468.93 776.4,105.6 793.42,88.58 U1.10@900.39,88.58
DVDD: C1.2 C5.1 C6.1 C9.1 C10.1 C11.1 C12.1 C19.1 C23.1 C24.1 CN1.1 CN2.1 CN2.17 Q1.S R4.2 R5.2 R9.2 SW1.3 SW1.4 SW2.3 SW2.4 SW3.3 SW3.4 SW4.3 SW4.4 U1.11 U1.12 U1.13 U1.21 U2.11 U2.27 U2.47 U2.51 U2.73 U2.75 U2.100 U3.3 | length 10206.9
  Top Layer w7: U2.27@223.84,-193.34 C9.1@335.48,-193.34
  Top Layer w8: -818.75,-325 U3.3@-818.75,-295.56
  Top Layer w10: U3.3@-818.75,-295.56 -818.75,-294.68 -819.65,-293.77 -848.25,-293.77 -866.07,-275.95 -866.07,-161.35 -860.21,-155.49 R4.2@-809.12,-155.49 ; R4.2@-810.56,-153 -810.56,-92.44 R5.2@-809.12,-91 ; v1(-392,-276) -392,-249.1 -385.65,-242.75 U2.100@-385.65,-213.22 ; U2.75@-317.22,327.65 -475.73,327.65 C11.1@-481.38,322 -482.38,323 C6.1@-482.38,388 -283.71,388 -277.85,382.14 U2.73@-277.85,327.65 -277.85,219.85 -258.17,200.17 154.17,200.17 v1(155,201) 155.83,200.17 U2.47@223.65,200.17 281.34,200.17 C19.1@346.31,265.14 346.31,327.12 C10.1@348.19,329 ; CN1.1@-124.8,-1063 -117.8,-1070.01 CN1.1@-117.8,-1072.02 ; C24.1@-40,-371.38 -72.38,-339 -110,-339 -120.37,-328.63 U2.11@-120.37,-281.65 -120.37,-211.06 v1(-120.79,-210.64) -101.36,-191.2 -101.36,-168.6 -61.72,-128.97 121.97,-128.97 186.54,-193.54 U2.27@223.65,-193.54 ; v1(155,269) 155.22,269.22 U2.51@155.22,327.65 ; C5.1@820,53 823.79,49.21 U1.12@900.39,49.21 U1.11@900.39,68.9 1004.61,68.9 1010.47,63.04 1010.47,-127.95 ; U1.21@900.39,-127.95 1010.47,-127.95 ; U1.13@900.39,29.53 1010.47,29.53 ; v1(1010.47,-166) 1010.47,-127.95
  Top Layer w12: v1(-1464,601) -1436,629 -1027,629 -662.73,264.73 -498.65,264.73 -481.38,282 C11.1@-481.38,322
  Top Layer w16: -1581.08,-537 v2(-1487,-537) ; v1(-1139.96,-523.1) -1139.96,-520.94 -1137.01,-517.98 CN2.1@-1137.01,-375 ; CN2.17@-1137.01,25 -1153.94,25 -1200,-21.06 -1200,-360.43 -1185.43,-375 CN2.1@-1137.01,-375 ; -867,-1423.14 -841.03,-1397.17 -841.03,-1367.37 v2(-837.28,-1363.62) -837.28,-1241.48 v1(-806,-1210.19) -440.38,-1210.19 -293.19,-1063 -234,-1063 CN1.1@-124.8,-1063 ; v1@-395.02,-280 C12.1@-495.38,-280 -495.38,-315.63 -504.75,-325 -818.75,-325 -836.62,-342.87 C1.2@-836.62,-385 -836.62,-426.63 -845.99,-436 -1049.62,-436 C23.1@-1049.62,-377 -1135.01,-377 CN2.1@-1137.01,-375 ; v1(-323.82,-1408) -323.82,-1472.18 -250,-1546 v1(-250,-1600.08) -250,-1601.31 -237.85,-1613.45 -237.85,-1652.18 ; 131.89,-1658.66 v1(131.89,-1598.11) v1(131.89,-1363.35) ; C9.1@335.48,-193.34 C9.1@335.82,-193 ; v1(714,-1234) v1(714,-1441) 744,-1471 744,-1497 ; R9.2@1529.45,178.41 R9.2@1533.39,182.35 ; Q1.S@1535.28,245.73 1535.28,197.5 1535.23,197.45 1535.23,184.19 R9.2@1533.39,182.35 ; 1661.87,150.85 1661.87,178.18 1657.71,182.35 R9.2@1533.39,182.35
  Top Layer w20: -1604.08,460.51 -1539,525.59 v1(-1539,602) ; v1(1560,-125.44) 1653.97,-125.44 1659.95,-119.45
  Bottom Layer w10: v1(155,201) v1(155,269)
  Bottom Layer w16: v2(-1487,-537) -1156.02,-537 -1142.13,-523.1 v1(-1139.96,-523.1) ; SW3.3@-912.98,-1365.38 -910.88,-1363.27 -837.64,-1363.27 v2(-837.28,-1363.62) ; v1(-806,-1210.19) -799.42,-1203.62 -799.42,-1165.35 SW3.4@-794.87,-1160.8 ; v1(-392,-276) -186.15,-276 v1(-120.79,-210.64) ; SW4.3@-323.82,-1598.11 -322.83,-1599.09 -250.98,-1599.09 v1(-250,-1600.08) ; v1(-323.82,-1408) SW4.4@-323.82,-1361.89 ; v1(131.89,-1598.11) SW1.3@176.18,-1598.11 ; v1(131.89,-1363.35) 174.72,-1363.35 SW1.4@176.18,-1361.89 ; SW2.4@667.02,-1234.62 667.64,-1234 v1(714,-1234) ; v1(714,-1441) 715.53,-1439.47 784.85,-1439.47 SW2.3@785.13,-1439.2
  Bottom Layer w20: v1(-1539,602) -1538.5,601.5 -1464.5,601.5 v1(-1464,601) ; v1(1010.47,-166) 1474.22,-166 1514.78,-125.44 v1(1560,-125.44)
FLOW_CMP_OUT: CN2.15 U2.7 U2.33 U2.60 U2.61 | length 2263.2
  Top Layer w7: CN2.15@-1137.01,-25 -961.97,-25 -794.23,142.74 -647.74,142.74 -558,53 -458,53 v1(-457,54) ; v1(-283,-20) -113,-20 -63.55,-69.45 -53.45,-69.45 v1@-53,-69 ; U2.7@-199.11,-281.65 -198.6,-281.13 -198.6,-148.14 -125.88,-75.43 v1@-58,-75.43 ; v1@-53,-75.43 U2.33@223.65,-75.43 ; U2.60@-21.94,327.65 -21.94,275.94 v1(-19,273)
  Top Layer w10: U2.61@-41.63,327.65 U2.60@-21.94,327.65
  Bottom Layer w7: v1(-457,54) -357,54 v1(-283,-20) ; v1(-58,-75) -58,-3.53 -19,35.47 v1(-19,273)
FLOW_DETECTOR: CN3.10 U2.43 | length 329.7
  Top Layer w7: U2.43@223.65,121.43 272.9,121.43 302.33,92 CN3.10@541.12,92
FLUID_TEMP_AN: CN3.8 U2.15 | length 916.2
  Top Layer w7: v1(-42.44,-185.47) -42.04,-185.87 -42.04,-281.24 U2.15@-41.63,-281.65 ; v1(462,39) 539.12,39 CN3.8@540.12,40
  Bottom Layer w7: v1(-42.44,-185.47) -42.44,-106.11 -37.5,-101.17 -37.5,-26.41 90.41,101.5 299.5,101.5 364,37 460,37 v1(462,39)
GND: BH1.NEG C1.1 C2.2 C3.1 C4.2 C5.2 C6.2 C7.2 C8.2 C9.2 C10.2 C11.2 C12.2 C13.2 C14.2 C15.2 C16.2 C17.2 C18.2 C19.2 C20.2 C21.2 C22.2 C23.2 C24.2 CN1.8 CN2.2 CN2.19 CN3.2 CN4.5 CN4.7 D1.2 ESD2.2 ESD3.2 J1.A1 J1.A2 J1.A3 J1.A4 LD1.K LD2.K LD3.K R7.1 R11.1 R12.1 R27.1 R28.1 R29.1 R30.1 U1.14 U2.10 U2.19 U2.26 U2.48 U2.50 U2.74 U2.99 U3.4 | length 3612.5
  Top Layer w7: U2.48@223.65,219.85 274.16,219.85 292.91,238.6 292.91,355.41 297.01,359.51 377.31,359.51 377.31,357.12 C10.2@405.43,329 v1(457.05,329) ; C18.2@405.43,397 v1(456,397) ; v1(530,1076) 530.89,1076.89 569.11,1076.89 ESD3.2@570,1077.79
  Top Layer w8: v1(-437,-237) -437,-202 -428.54,-193.54 U2.99@-385.65,-193.54 ; U2.74@-297.54,327.65 -297.54,192.54 v1(-275,170) ; v1(-161,-208) -140.06,-228.94 U2.10@-140.06,-281.65 ; 28.5,-474.5 C22.2@28.5,-430.12 ; C22.2@30,-441.5 31.5,-443 C22.2@34,-443 ; C22.2@31,-446 C22.2@34,-443 ; U2.19@37.11,-281.65 37.11,-337.85 62,-362.74 62,-440.14 ; C13.2@96,-441.5 C14.2@160,-441.5 163.5,-441.5 165.5,-441.5 C14.2@166,-442 ; C13.2@100,-443 C22.2@34,-443
  Top Layer w10: CN2.2@-1262.99,-375 CN2.2@-1260,-377.99 ; CN2.19@-1137.01,75 v1(-1068,75) ; C8.2@-1006.38,-312.69 C8.2@-1004.81,-311.12 ; C23.2@-992.01,-389.56 -978.45,-376 v2(-917,-376) ; C8.2@-992.02,-310.43 -989.76,-312.69 v2(-930.01,-312.69) ; U3.4@-787.25,-295.56 -787.25,-291.62 -763.63,-268 v1(-750.91,-268) ; C1.1@-778,-383.62 C1.1@-779.38,-385 v1(-733,-385) ; v1(-706,-1474) -702.21,-1474 -689.21,-1487 -613.85,-1487 R29.1@-612.56,-1485.71 ; v1(-599,-79) R12.1@-558.56,-79 ; v1(-584.32,387.85) -539.77,387.85 C6.2@-539.62,388 ; v1(-582.97,321.49) -539.14,321.49 C11.2@-538.62,322 ; C17.2@-555.62,-210.71 C17.2@-552.62,-207.71 ; v1(-372.18,-939) R30.1@-329.56,-939 ; -362,-476 -362,-428.62 C15.2@-298,-428.62 ; v1(-259,-872) C4.2@-204.24,-872 ; -208,-538 -208,-496.62 C21.2@-206.38,-495 ; C20.2@-138.62,-494 -138,-494.62 v1@-138,-538 ; C24.2@-40,-428.62 -40,-475.5 -39.5,-476 ; CN1.8@157.8,-1072.02 157.8,-1008.2 158,-1008 v1(158,-1002) ; 163.5,-473 C14.2@163.5,-441.5 ; U2.26@223.65,-213.22 289.22,-213.22 304,-228 387.21,-228 393.06,-222.14 C9.2@393.06,-193 v1(443.93,-193) ; U2.50@223.65,259.22 224.16,259.73 v2(224.16,309.31) ; v1(322,1532) R11.1@365.31,1532 ; R7.1@377,-96 377,-92.06 401.38,-67.68 417.32,-67.68 v1(420,-65) ; ESD2.2@398.4,1216 399.4,1215 449,1215 v1(450,1214) ; C19.2@403.67,265.02 403.78,265.14 v1(457.05,265.14) ; R28.1@421.06,-1150 v1(421.06,-1103) ; R27.1@468.95,-1410 468.95,-1406.06 501.85,-1373.17 501.85,-1363.46 v1(500.28,-1361.89) ; C3.1@478.31,-1290.19 515.38,-1253.12 v1(520.12,-1253.12) ; CN3.2@540.12,-110 v1(604,-110) ; v1(785,-41) 785,-38.62 819.62,-4 833.47,9.84 U1.14@900.39,9.84
  Top Layer w16: J1.A4@-1420.27,368.74 J1.A3@-1420.27,418.74 -1420.91,419.37 -1420.27,420 J1.A2@-1420.27,468.74 J1.A1@-1420.27,518.74 ; J1.A4@-1420.27,369.01 -1420,368.74 -1420.14,368.6 -1420.14,280.14 v2(-1420,280)
  Top Layer w20: v2(-1260,-442.64) CN2.2@-1260,-377.99 ; v1(-602,-280) -556,-280 C12.2@-554.62,-281.38 ; v1(-601,-210.71) C17.2@-555.62,-210.71 ; C7.2@-551.38,-1340 v2(-441,-1340) ; C2.2@594.45,-1410 594.72,-1409.72 594.72,-1350.28 v1(595,-1350)
  Bottom Layer w20: v2@-1260.82,-441.82 v2(-1260,-442.64)
  other v1: -208,-550.87 -139.82,-549.06 -362,-488.87 -39.5,-488.87 28.5,-487.37 163.5,-485.87
I2C1_SCL: R5.1 U2.95 U3.2 | length 550.9
  Top Layer w10: U3.2@-818.75,-240.44 -818.75,-221.75 -778,-181 -778,-125 -756.72,-103.72 -752.78,-103.72 -744,-94.94 R5.1@-744,-91 -681,-91 -657.2,-114.8 U2.95@-385.65,-114.8
I2C1_SDA: R4.1 U2.96 U3.1 | length 472.2
  Top Layer w10: U3.1@-787.25,-240.44 -787.25,-236.5 -745.44,-194.69 R4.1@-745.44,-153 -675,-153 -656.48,-134.48 U2.96@-385.65,-134.48
JTDI: ESD2.3 R15.2 U2.77 | length 2004.7
  Top Layer w7: v1(-421,291) -424,291 -433,282 -433,247 -425.54,239.54 U2.77@-385.65,239.54 ; v1(-386.4,1096) 438.13,1096 501.04,1158.91 R15.2@501.04,1188.7 501.04,1216.61 496.94,1220.71 479.29,1220.71 458.41,1241.59 ESD2.3@398.4,1241.59
  Bottom Layer w7: v1(-421,291) -421,663.82 -403.96,680.86 -403.96,1078.44 v1(-386.4,1096)
KEY_DOWN: C3.2 CN1.5 R22.2 U2.38 | length 1838.2
  Top Layer w7: v1(57.42,-870) 41,-886.41 41,-1070.7 CN1.5@39.69,-1072.02 39.69,-1121.89 207.99,-1290.19 C3.2@421.06,-1290.19 R22.2@421.06,-1214.06 ; v1(137,-33) 161.13,-8.87 161.13,2.13 182,23 U2.38@223.65,23
  Bottom Layer w7: v1(57.42,-870) 100.28,-827.13 100.28,-723.16 57.42,-680.29 28.5,-651.37 28.5,-534 50,-512.5 50,-109.77 86.76,-73.01 96.99,-73.01 v1(137,-33)
KEY_ENTER: C4.1 CN1.3 R24.2 U2.40 | length 1511.9
  Top Layer w7: R24.2@-142,-939 -142,-905.51 -147,-900.51 C4.1@-147,-872 -145,-870 v1(-39.06,-870) CN1.3@-39.06,-1072.02 ; v1(116.5,35.47) 143.4,62.37 U2.40@223.65,62.37
  Bottom Layer w7: v1(-39.06,-870) -91.96,-817.09 -91.96,-609.02 -6,-523.06 -6,-87.03 v1(116.5,35.47)
KEY_ESC: C7.1 CN1.2 R23.2 U2.41 | length 2200
  Top Layer w7: v1(116.5,81) 117.03,81.53 223.12,81.53 U2.41@223.65,82.06
  Top Layer w10: R23.2@-612.56,-1415.71 -612.56,-1380.56 -608.62,-1376.62 C7.1@-608.62,-1340 -608.62,-1309 -598.62,-1299 -139,-1299 -78.43,-1238.43 CN1.2@-78.43,-1072.02 -80.95,-1069.5 -80.95,-923.8 v1(-83.46,-921.28)
  Bottom Layer w7: v1(-83.46,-921.28) -108,-896.75 -108,-608.09 -19,-519.09 -19,-54.5 v1(116.5,81)
KEY_UP: C2.1 CN1.4 R8.2 U2.39 | length 2164.9
  Top Layer w7: v1(0.74,-852.31) 0.74,-1071.6 CN1.4@0.32,-1072.02 0.32,-1121.58 250,-1371.27 250,-1498.46 266.54,-1515 468.95,-1515 468.95,-1507.56 R8.2@468.95,-1480 ; v1(138.8,12.26) 140.26,12.26 170.69,42.69 U2.39@223.65,42.69
  Top Layer w10: R8.2@468.95,-1480 531.34,-1480 537.2,-1474.14 C2.1@537.2,-1410
  Bottom Layer w7: v1(0.74,-852.31) 0.32,-851.89 0.32,-533.71 7,-527.03 7,-121 138.8,10.8 v1(138.8,12.26)
LCD_BACKLIGHT: Q1.G R9.1 U2.97 | length 3706.7
  Top Layer w10: v1(-502,-821) -94.09,-821 -91.41,-818.31 1319.69,-818.31 1464.33,-673.67 R9.1@1464.33,178.41 1458.5,184.24 Q1.G@1458.5,245.73 ; v1(-467,-163) -463.21,-163 -454.38,-154.17 U2.97@-385.65,-154.17
  Bottom Layer w10: v1(-502,-821) -502,-509.39 -467,-474.39 v1(-467,-163)
LED_ACTIVE: R2.1 U2.92 | length 1352.9
  Top Layer w7: v1(-782,-947) -782,-977 -763.72,-995.28 R2.1@-729.12,-995.28 ; v1(-668,-44) -652,-28 -465.83,-28 -438.09,-55.74 U2.92@-385.65,-55.74
  Bottom Layer w7: v1(-782,-947) -785.25,-943.75 -791.18,-943.75 -791.96,-942.96 -791.96,-716.87 -779,-703.91 -779,-526.97 -681,-428.97 -681,-61.6 -668,-48.6 v1(-668,-44)
LED_ERROR: R1.1 U2.91 | length 1473.8
  Top Layer w7: v1(-802,-1035) -757.39,-1079.61 ; -757,-1079 -756.39,-1079.61 R1.1@-729.19,-1079.61 ; v1(-697,-28) -679.86,-10.86 -466,-10.86 -440.8,-36.06 U2.91@-385.65,-36.06
  Bottom Layer w7: v1(-802,-1035) -806,-1031 -806,-713.93 -791,-698.93 -791,-522 -697,-428 v1(-697,-28)
LED_SIGNAL: R3.1 U2.93 | length 1163.2
  Top Layer w7: R3.1@-729.12,-910 -729.12,-848.12 v1(-704,-823) ; v1(-654.06,-79) -654.06,-61.28 -643,-50.23 -460.57,-50.23 -435.37,-75.43 U2.93@-385.65,-75.43
  Bottom Layer w7: v1(-704,-823) -703,-822 -703,-480 -654.06,-431.06 v1(-654.06,-79)
NetC20_1: C20.1 LSE.1 U2.9 | length 261.5
  Top Layer w7: U2.9@-159.74,-281.65 -159.74,-358.3 -117,-401.04 LSE.1@-117,-413 ; LSE.1@-120.79,-413 -120.79,-428.75 -81,-468.54 C20.1@-81,-509
NetC21_1: C21.1 LSE.2 U2.8 | length 248.2
  Top Layer w7: C21.1@-263.62,-495 -258.26,-489.64 -258.26,-468.92 -231.18,-441.83 -231.18,-411.97 -219.21,-400 -219.21,-384.25 -199.53,-364.57 -199.53,-339 -179.43,-318.9 U2.8@-179.43,-281.65
NetCN4_11: CN4.11 R11.2 | length 384.8
  Top Layer w10: R11.2@420.84,1532 493,1532 552,1473 685,1473 716.8,1441.2 CN4.11@716.8,1390
NetD1_1: D1.1 R10.1 | length 360.5
  Top Layer w10: v1(1450.55,372) 1450.55,322.71 1497.41,275.85 R10.1@1600,275.85
  Bottom Layer w10: v1(1450.55,372) 1450.55,505.67 D1.1@1456.69,511.81
NetJ1_B1: J1.B1 R26.1 | length 84.3
  Top Layer w7: J1.B1@-1138.78,518.74 -1056.26,518.74 R26.1@-1055,520
NetJ1_B2: J1.B2 R25.1 | length 95.2
  Top Layer w7: J1.B2@-1138.78,468.74 -1067.57,468.74 -1055,456.16 R25.1@-1055,450
NetJ1_B3: J1.B3 R21.1 | length 101.4
  Top Layer w7: J1.B3@-1138.78,418.74 -1082.51,418.74 -1055,391.23 R21.1@-1055,385
NetJ1_B4: J1.B4 R20.1 | length 110.2
  Top Layer w7: J1.B4@-1138.78,368.74 -1096.68,368.74 -1050,322.05 R20.1@-1050,320
NetL1_2: L1.2 U2.46 | length 111.5
  Top Layer w10: U2.46@223.65,180.48 333.09,180.48 L1.2@334.57,179
NetLD1_A: LD1.A R1.2 | length 73.9
  Top Layer w7: R1.2@-655.67,-1079.28 -654.95,-1080 v1(-622.21,-1080)
  Bottom Layer w7: v1@-622.21,-1079.61 -582.64,-1079.61 LD1.A@-582.24,-1080
NetLD2_A: LD2.A R2.2 | length 60.2
  Top Layer w7: R2.2@-654.78,-995.28 v1(-622.21,-995.28)
  Bottom Layer w7: v1(-622.21,-995.28) -595.1,-995.28 ; LD2.A@-582.2,-994.61 LD2.A@-581.81,-995
NetLD3_A: LD3.A R3.2 | length 73.6
  Top Layer w7: R3.2@-654.78,-909.61 -624.65,-909.61 v1(-624.08,-909.04)
  Bottom Layer w7: v1(-624.08,-909.04) -582.77,-909.04 LD3.A@-581.81,-910
NetQ1_D: Q1.D R10.2 | length 104.4
  Top Layer w10: Q1.D@1496.89,344.16 1540.04,344.16 1543.23,340.97 R10.2@1600,340.97